# Altium PCB PC110.PcbDoc (part 18 of 24)
Units mm, origin at the board's own origin, x right, y up, seen from the top; angles counter-clockwise.
Board outline 150.05 x 107.35 mm, 10 copper layers (In2.Cu, F.Cu, B.Cu, In1.Cu, In3.Cu, In4.Cu, In5.Cu, In6.Cu, In7.Cu, In8.Cu); 936 components, 1434 nets, 4891 pads, 6088 vias.
Unrouted connection lines stored in the file: 2995.
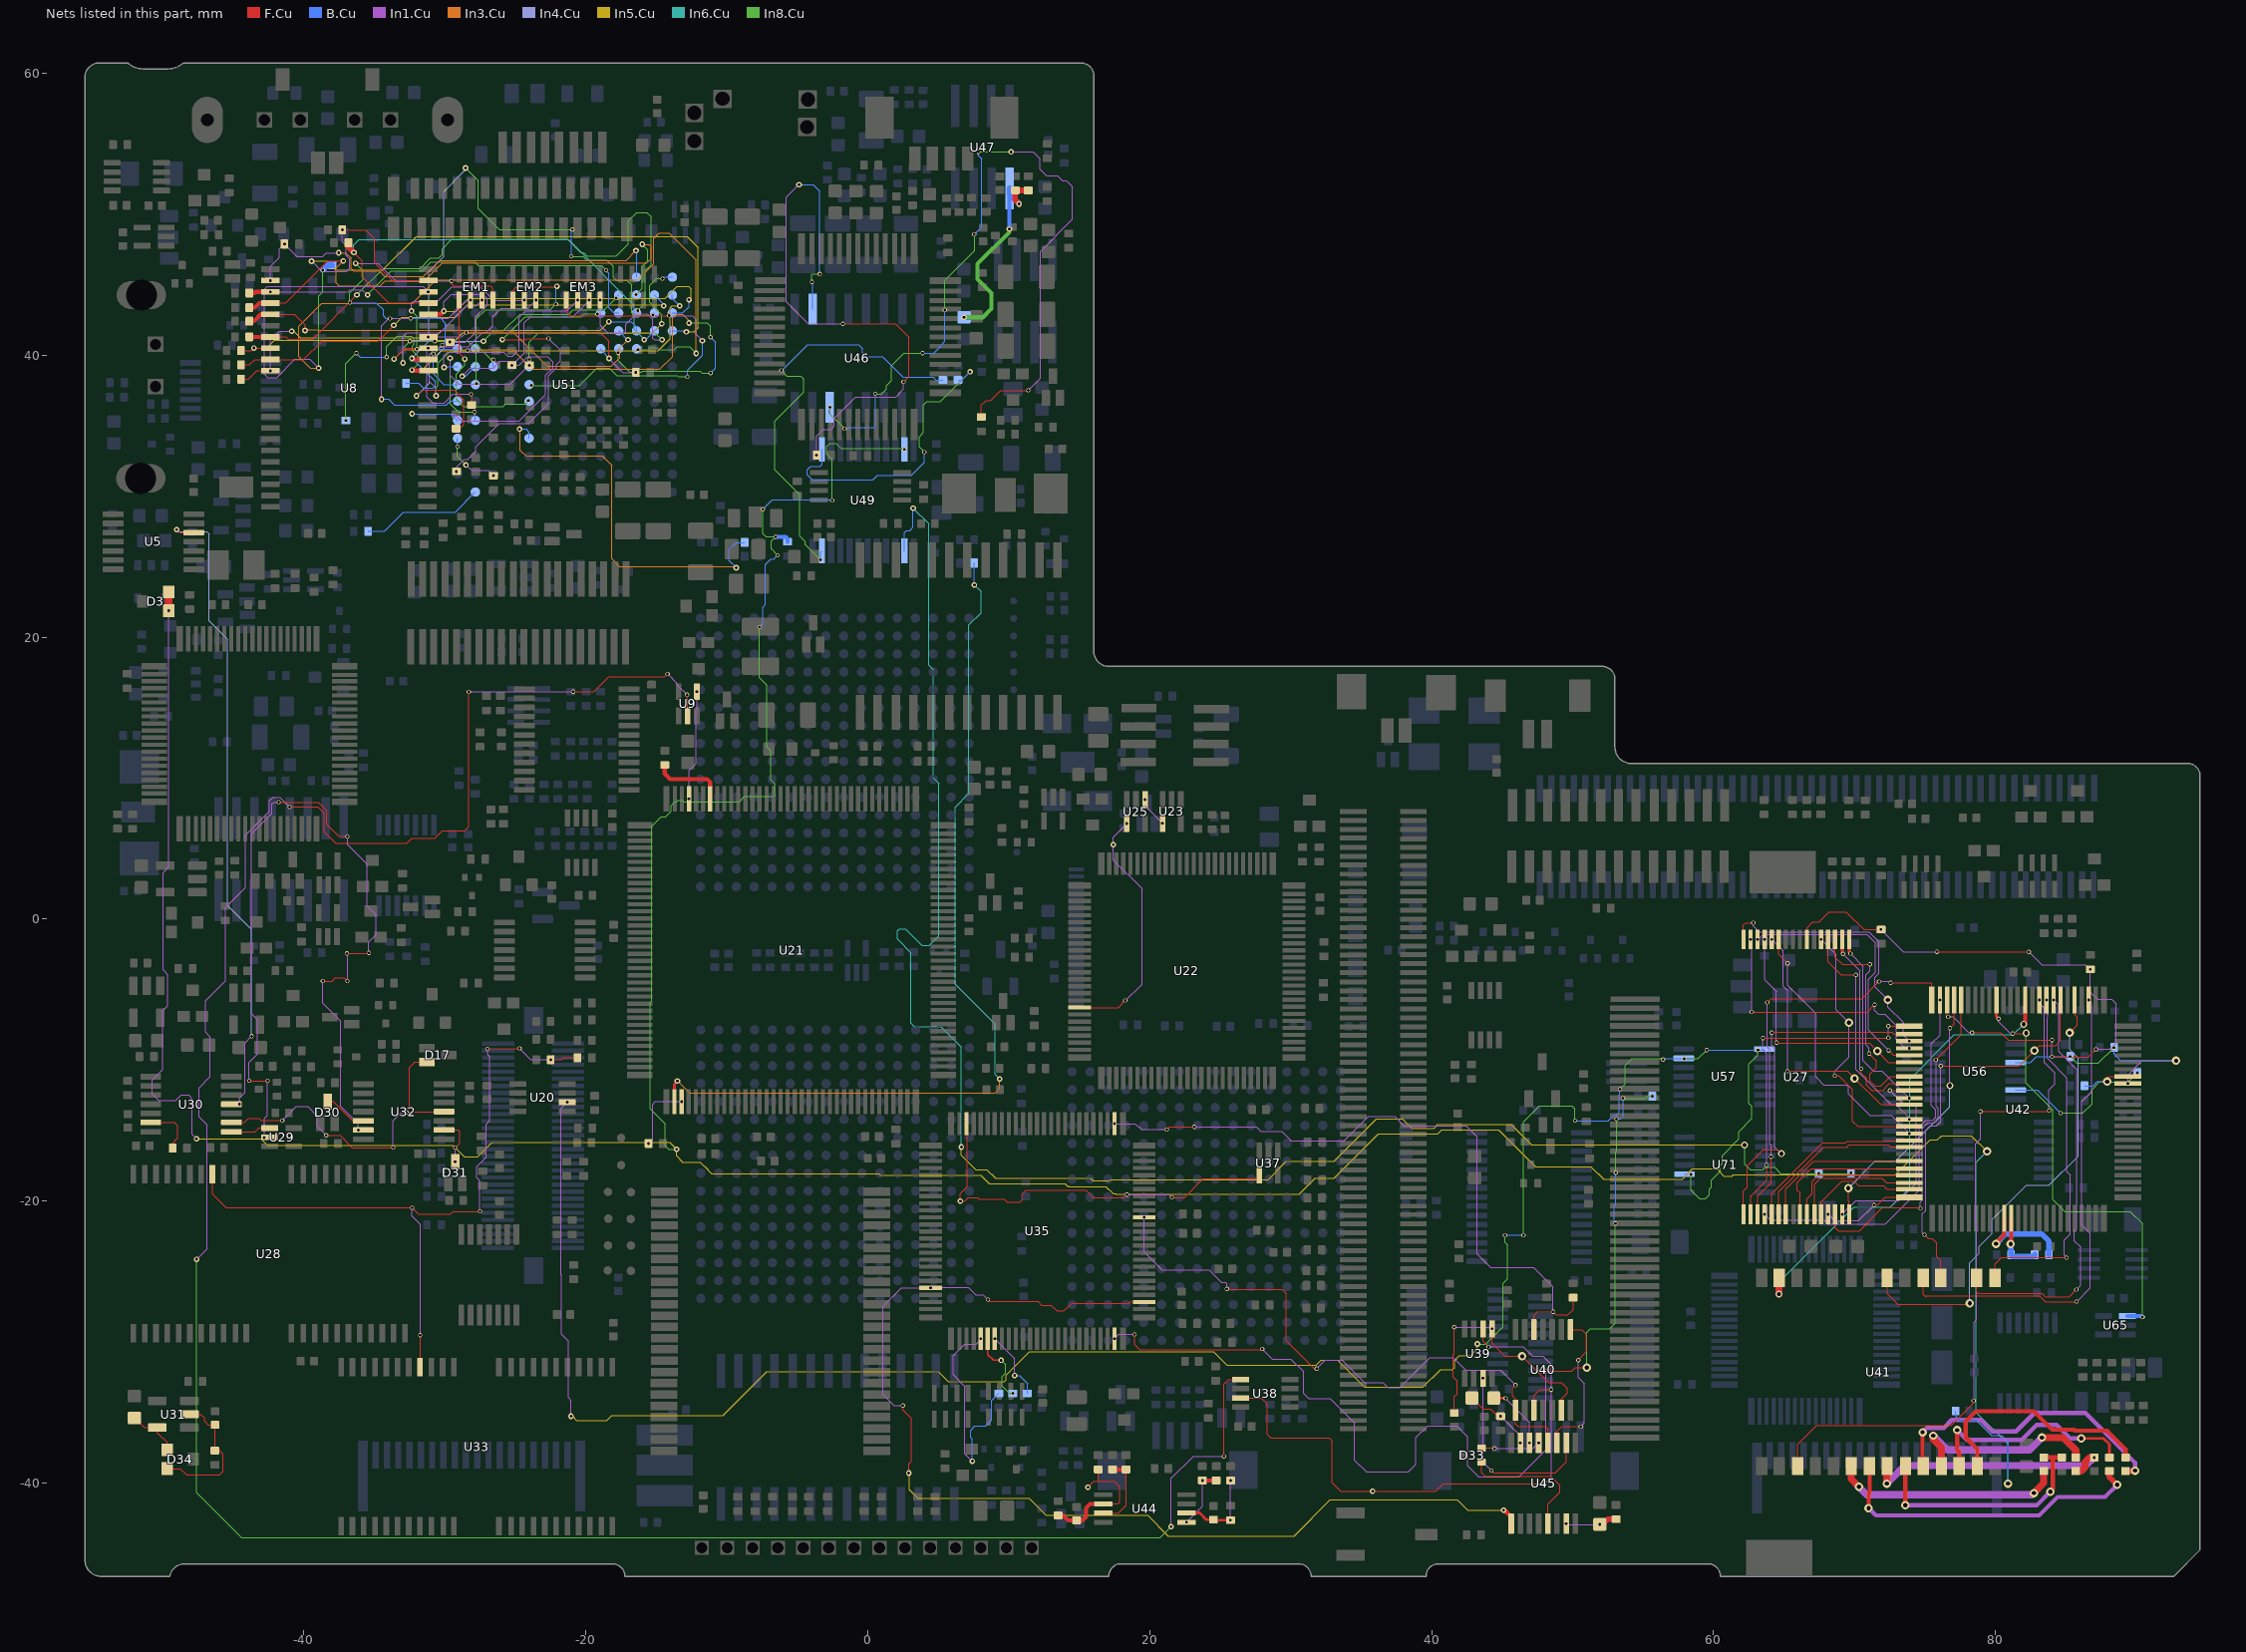
[diagram p25: the nets of this part, all layers, seen from the top]

## Via types
v1: diameter 0.3, hole 0.2, B.Cu to In8.Cu, tented both sides, 1934 vias
v2: diameter 0.4, hole 0.2, F.Cu to B.Cu, tented both sides, 1902 vias
v3: diameter 0.3, hole 0.2, F.Cu to In1.Cu, tented both sides, 1729 vias
v4: diameter 0.6, hole 0.3, F.Cu to B.Cu, tented both sides, 354 vias
v5: diameter 0.5, hole 0.3, F.Cu to B.Cu, tented both sides, 136 vias
v6: diameter 0.4, hole 0.2, B.Cu to In8.Cu, tented both sides, 12 vias
v7: diameter 0.3, hole 0.2, F.Cu to B.Cu, tented both sides, 6 vias
v8: diameter 0.6, hole 0.2, F.Cu to B.Cu, tented both sides, 4 vias
v9: diameter 0.5, hole 0.2, B.Cu to In8.Cu, tented both sides, 3 vias
v10: diameter 0.5, hole 0.2, F.Cu to B.Cu, tented both sides, 2 vias
v11: diameter 0.4, hole 0.3, F.Cu to B.Cu, tented both sides, 2 vias
v12: diameter 0.3, hole 0.2, F.Cu to In4.Cu, tented both sides, 2 vias
v13: diameter 0.6, hole 0.3, B.Cu to In8.Cu, tented both sides, 1 vias
v14: diameter 0.3, hole 0.2, F.Cu to In3.Cu, tented both sides, 1 vias

## Nets (pads, with @x,y where several pads share a name; then routed paths per layer and width w, separated by ;. In a path a pad name is that pad's centre, name@x,y a point inside that pad or via, vN(x,y) a via of type N, cw(c..) or ccw(c..) an arc to the next point about the centre after c; other vN are vias at no path point) (continued)
Net-(U20-Pad6): U20.6 U57.1 U57.13 U71.3 | length 148.8
  In1.Cu w0.08: v3(-21.32,-12.98) -21.77,-13.43 -21.77,-25.2 -21.73,-25.24 -21.73,-29.44 -21.24,-29.93 -21.24,-33.92 -21.04,-34.12 v2(-21.04,-35.25)
  In5.Cu w0.08: v2(-21.04,-35.25) -20.94,-35.25 -20.65,-35.54 -18.52,-35.54 -18.165,-35.185 -10.265,-35.185 -7.15,-32.07 5.01,-32.07 5.72,-32.78 9.7,-32.78 9.82,-32.66 9.82,-32.34 11.47,-30.69 24.52,-30.69 25.47,-31.64 31.8,-31.64 32.15,-31.29 33.33,-31.29 35.24,-33.2 39.39,-33.2 40.64,-31.95 41.47,-31.95 41.62,-31.8 41.62,-31.3 41.97,-30.95 42.77,-30.95 43.24,-30.48 v2(43.24,-30.13)
  In8.Cu w0.08: v2(43.24,-30.13) 43.82,-30.13 45.06,-28.89 45.06,-25.84 45.39,-25.51 45.39,-23.11 45.21,-22.93 v1(45.21,-22.41) ; v1(46.52,-22.41) 46.52,-14.38 47.66,-13.24 49.94,-13.24 50.17,-13.47 v1(50.17,-14.29) ; v1(53.35,-12.05) 53.72,-11.68 53.72,-10.39 54.23,-9.88 56.34,-9.88 v1(56.41,-9.95) ; v1(57.92,-9.89) 58.9,-9.89 v1(59.51,-9.28) ; v1(58.4,-18.1) 58.4,-19.21 59,-19.81 59.42,-19.81 59.71,-19.52 59.71,-19.16 59.85,-19.02 59.85,-18.5 60.48,-17.87 60.48,-17.5 60.62,-17.36 60.62,-16.76 61.79,-15.59 61.79,-15.07 62.72,-14.14 62.72,-13.27 62.5,-13.05 62.5,-10.28 63.14,-9.64 v1(63.14,-9.28)
  B.Cu w0.08: v1(45.21,-22.41) v1(46.52,-22.41) ; v1(50.17,-14.29) 52.53,-14.29 52.94,-13.88 53.11,-13.88 53.29,-13.7 53.29,-12.47 53.35,-12.41 v1(53.35,-12.05) ; v1(56.41,-9.95) 56.49,-9.87 U57.13@57.877,-9.87 57.897,-9.89 v1(57.92,-9.89) ; U71.3@57.937,-18.08 57.957,-18.1 v1(58.4,-18.1) ; v1(59.51,-9.28) v1(63.14,-9.28) 63.542,-9.28 U57.1@63.603,-9.22
Net-(U21-Chipset_IO3): R149.1 U21.39 | length 5
  In1.Cu w0.08: v3(-15.55,-15.91) -15.26,-15.62 -15.26,-13.13 -15.07,-12.94 v3(-13.206,-12.94)
Net-(U21-CPUCLK): R257.1 U21.38 | length 64.4
  F.Cu w0.2: U21.38@-13.714,-12.94 -13.714,-11.694 v2(-13.5,-11.48)
  In3.Cu w0.08: v2(-13.5,-11.48) -12.65,-12.33 9.04,-12.33 9.36,-12.01 v2(9.36,-11.33)
  In6.Cu w0.08: v2(7.56,23.71) 8.03,23.24 8.03,21.74 7.18,20.89 7.18,8.91 6.2,7.93 6.2,-4.61 9.04,-7.45 9.04,-11.01 v2(9.36,-11.33)
  B.Cu w0.08: R257.1@7.55,25.26 7.55,23.72 v2(7.56,23.71)
Net-(U21-PSU_IO2): R104.1 U21.138 | length 5.3
  F.Cu w0.3: R104.1@-14.4,10.93 -14.4,10.32 -14.02,9.94 -11.4,9.94 -11.18,9.72 U21.138@-11.18,8.535
Net-(U21-PWRGD_IN): U9.4 U21.141 | length 7.8
  In1.Cu w0.08: v3(-12.68,8.535) -12.68,10.56 -12.18,11.06 -12.18,14.84 -12.12,14.9 v3(-12.12,16.14)
Net-(U22-IOW#): U22.43 U25.4 | length 17.7
  F.Cu w0.08: U22.43@15.03,-6.26 17.76,-6.26 v3(18.26,-5.76)
  In1.Cu w0.08: v3(18.26,-5.76) 18.3,-5.76 19.46,-4.6 19.46,2.16 17.42,4.2 v2(17.42,5.28) 17.42,5.83 v3(18.37,6.78)
Net-(U23-Pad4): U23.4 U25.1 | length 2.2
  In1.Cu w0.08: v3(19.67,8.48) 19.67,8.04 v3(20.91,6.8)
Net-(U27-MA0): U27.20 U42.74 | length 26.9
  In1.Cu w0.08: v3(63.62,-20.93) 64.02,-21.33 67.85,-21.33 68.13,-21.61 72.18,-21.61 74.58,-19.21 74.58,-14.72 75.04,-14.26 75.54,-14.26 75.74,-14.06 75.74,-13.51 75.44,-13.21 75.44,-8.83 76.06,-8.21 v3(76.06,-5.725)
Net-(U27-MA1): U27.19 U42.75 | length 29
  F.Cu w0.08: U27.19@63.12,-20.93 63.12,-19.65 64.07,-18.7 v3(64.07,-16.85) ; v3(63.8,-5.91) 64.08,-5.63 70.52,-5.63 v3(71.73,-4.42) ; v3(72.56,-4.51) 75.39,-4.51 75.46,-4.58 U42.75@75.46,-5.725
  In1.Cu w0.08: v3(63.8,-5.91) 63.8,-9.03 63.86,-9.09 63.86,-9.13 63.98,-9.25 63.98,-12.8 63.98,-15.96 64.07,-16.05 v3(64.07,-16.85) ; v3(71.73,-4.42) 72.47,-4.42 v3(72.56,-4.51)
Net-(U27-MA2): U27.18 U42.76 | length 24.3
  F.Cu w0.08: U27.18@62.62,-20.93 62.62,-19.65 63.76,-18.51 v3(63.76,-17.43) ; v3(63.5,-8.43) 72.39,-8.43 v3(72.4,-8.42) ; v3(72.4,-7.58) 72.72,-7.58 72.725,-7.575 U42.76@73.885,-7.575
  In1.Cu w0.08: v3(63.5,-8.43) 63.5,-9.26 63.76,-9.52 v3(63.76,-17.43) ; v3(72.4,-8.42) v3(72.4,-7.58)
Net-(U27-MA3): U27.17 U42.77 | length 25.3
  F.Cu w0.08: U27.17@62.12,-20.93 62.12,-19.28 62.4,-19 62.4,-17.47 63.52,-16.35 64.54,-16.35 v5(64.82,-16.63) ; v3(64.13,-8.04) 64.17,-8 72.64,-8 72.79,-8.15 U42.77@73.885,-8.15
  In1.Cu w0.08: v3(64.13,-8.04) 64.13,-8.93 64.25,-9.05 64.25,-9.1 64.35,-9.2 64.35,-16.16 v5(64.82,-16.63)
Net-(U27-MA4): U27.16 U42.78 | length 19.5
  F.Cu w0.08: U27.16@62.12,-1.43 62.12,-0.4 62.27,-0.25 v3(62.81,-0.25)
  In1.Cu w0.08: v3(62.81,-0.25) 62.81,-0.47 63.24,-0.9 71,-0.9 71.71,-1.61 71.71,-3.84 71.43,-4.12 71.43,-4.79 v4(72.36,-5.72) 72.36,-6.23 73.44,-7.31 73.44,-8.205 v3(73.885,-8.65)
Net-(U27-MA5): U27.15 U42.79 | length 18.7
  F.Cu w0.08: v3(62.71,-6.58) 70.91,-6.58 v3(71.42,-6.07)
  In1.Cu w0.08: v3(62.62,-1.43) 62.71,-1.52 v3(62.71,-6.58) ; v3(71.42,-6.07) 71.42,-6.47 71.7,-6.75 72.15,-6.75 72.96,-7.56 72.96,-8.54 73.57,-9.15 v3(73.885,-9.15)
Net-(U27-MA6): U27.14 U42.80 | length 18.8
  F.Cu w0.08: v3(72.42,-9.31) 72.76,-9.65 U42.80@73.885,-9.65
  In1.Cu w0.08: v3(63.12,-1.43) 63.15,-1.43 63.51,-1.07 70.87,-1.07 71.47,-1.67 71.47,-3.77 70.97,-4.27 70.97,-7.86 v3(72.42,-9.31)
Net-(U27-MA7): U27.13 U42.81 | length 17.7
  F.Cu w0.08: v3(64.46,-8.75) 64.5,-8.79 71.05,-8.79 v4(71.62,-9.36) 72.41,-10.15 U42.81@73.885,-10.15
  In1.Cu w0.08: v3(63.62,-1.43) 63.62,-4.29 64.43,-5.1 64.43,-8.72 v3(64.46,-8.75)
Net-(U27-MA8): U27.3 U42.83 | length 16
  F.Cu w0.08: U27.3@68.62,-1.43 68.62,-2.69 69.13,-3.2 v3(71.08,-3.2) ; v3(71.03,-9.53) 71.56,-10.06 71.56,-10.53 71.1,-10.99 71.1,-11.48 71.44,-11.82 71.86,-11.82 72.53,-11.15 U42.83@73.885,-11.15
  In1.Cu w0.08: v3(71.03,-9.53) 71.03,-9.15 70.79,-8.91 70.79,-3.94 71.08,-3.65 v3(71.08,-3.2)
Net-(U27-MA9): U27.2 U42.84 | length 14.5
  F.Cu w0.08: v3(70.46,-10.6) 70.46,-10.9 70.83,-11.27 70.83,-11.77 71.18,-12.12 71.22,-12.12 71.23,-12.13 71.99,-12.13 72.47,-11.65 U42.84@73.885,-11.65
  F.Cu w0.2: U27.2@69.12,-1.43 69.12,-2.4 v3(69.18,-2.46)
  In1.Cu w0.08: v3(69.18,-2.46) 70.39,-3.67 70.39,-10.53 v3(70.46,-10.6)
Net-(U27-MA10): U27.31 U42.85 | length 15.3
  F.Cu w0.08: v3(72.5,-12.15) U42.85@73.885,-12.15
  In1.Cu w0.08: v3(69.12,-20.93) 70.09,-19.96 73.14,-19.96 74.39,-18.71 74.39,-13.31 74.23,-13.15 73.5,-13.15 v3(72.5,-12.15)
Net-(U27-MA11): U27.1 U42.86 | length 13.4
  F.Cu w0.2: U27.1@69.62,-1.43 69.62,-2.35 v3(69.71,-2.44)
  In1.Cu w0.08: v3(69.71,-2.44) 70.6,-3.33 70.6,-10.04 71.32,-10.76 71.945,-10.76 v3(73.885,-12.7)
Net-(U27-MA12): U27.12 U42.87 | length 19.4
  F.Cu w0.08: v3(65.24,-10.78) 69.48,-10.78 v4(70,-11.3) 71.85,-13.15 U42.87@73.885,-13.15
  In1.Cu w0.08: v3(64.12,-1.43) 64.93,-2.24 64.93,-4.75 65.24,-5.06 v3(65.24,-10.78)
Net-(U27-MA13): U27.4 U42.89 | length 16
  F.Cu w0.08: U27.4@68.12,-1.43 68.12,-3.02 69.04,-3.94 v3(70.09,-3.94)
  In1.Cu w0.08: v3(70.09,-3.94) 70.09,-10.67 72.56,-13.14 72.94,-13.14 73.885,-14.085 v3(73.885,-14.2)
Net-(U27-MA14): U27.5 U42.90 | length 19
  F.Cu w0.08: v3(68.59,-11.1) 68.87,-11.1 69.86,-12.09 69.86,-14.33 70.23,-14.7 U42.90@73.885,-14.7
  In1.Cu w0.08: v3(67.62,-1.43) 68.69,-2.5 68.69,-6.41 v4(69.61,-7.33) 69.61,-9.79 68.59,-10.81 v3(68.59,-11.1)
Net-(U27-MA15): U27.11 U42.91 | length 19.4
  F.Cu w0.08: U27.11@64.62,-1.43 64.62,-2.5 v3(65.25,-3.13)
  In1.Cu w0.08: v3(65.25,-3.13) 65.25,-4.68 67.22,-6.65 67.22,-11.16 67.81,-11.75 69.41,-11.75 69.56,-11.9 69.56,-12.38 71.09,-13.91 72.595,-13.91 v3(73.885,-15.2)
Net-(U27-MD0): U27.21 U42.92 | length 12.8
  F.Cu w0.08: U27.21@64.12,-20.93 64.12,-19.47 67.73,-15.86 69.35,-15.86 69.45,-15.76 71.97,-15.76 72.03,-15.7 U42.92@73.885,-15.7
Net-(U27-MD1): U27.22 U42.93 | length 12.3
  F.Cu w0.08: U27.22@64.62,-20.93 64.62,-19.34 67.8,-16.16 69.45,-16.16 69.61,-16 72.4,-16 72.55,-16.15 U42.93@73.885,-16.15
Net-(U27-MD2): U27.23 U42.95 | length 11.4
  F.Cu w0.08: U27.23@65.12,-20.93 65.12,-19.13 67.1,-17.15 U42.95@73.885,-17.15
Net-(U27-MD3): U27.25 U42.96 | length 10.7
  F.Cu w0.08: U27.25@66.12,-20.93 66.14,-20.91 66.14,-19.41 65.94,-19.21 65.94,-18.67 66.91,-17.7 U42.96@73.885,-17.7
Net-(U27-MD4): U27.26 U42.97 | length 9.6
  F.Cu w0.08: U27.26@66.62,-20.93 66.62,-19.82 66.98,-19.46 66.98,-18.6 67.43,-18.15 U42.97@73.885,-18.15
Net-(U27-MD5): U27.27 U42.98 | length 9.2
  F.Cu w0.08: U27.27@67.17,-20.93 67.17,-18.78 67.57,-18.38 71.94,-18.38 72.26,-18.7 U42.98@73.885,-18.7
Net-(U27-MD6): U27.28 U42.99 | length 8
  F.Cu w0.08: U27.28@67.62,-20.93 67.62,-20.06 69.09,-18.59 69.95,-18.59 70.26,-18.9 72.04,-18.9 72.29,-19.15 U42.99@73.885,-19.15
Net-(U27-MD7): U27.29 U42.100 | length 6.6
  F.Cu w0.08: v3(71.39,-20.28) 71.62,-20.28 72.175,-19.725 U42.100@73.885,-19.725
  In1.Cu w0.08: v3(68.12,-20.93) 68.58,-21.39 70.28,-21.39 v3(71.39,-20.28)
Net-(U27-ROMCEL0#): U27.30 U42.71 | length 24.1
  F.Cu w0.08: U27.30@68.62,-20.93 68.62,-21.87 68.85,-22.1 70.35,-22.1 71.98,-20.47 74.64,-20.47 v3(74.67,-20.5) ; v3(75.76,-9.98) 77.56,-8.18 U42.71@77.56,-5.725
  In1.Cu w0.08: v3(74.67,-20.5) 74.67,-20.07 74.81,-19.93 74.81,-14.84 75.2,-14.45 75.62,-14.45 75.92,-14.15 75.92,-13.42 75.79,-13.29 75.79,-10.01 v3(75.76,-9.98)
Net-(U27-ROMOEL#): U27.32 U42.72 | length 19.2
  F.Cu w0.08: v4(69.55,-19.08) 69.55,-19.98 69.62,-20.05 U27.32@69.62,-20.93 ; v3(76.76,-7.73) 77.06,-7.43 U42.72@77.06,-5.725
  In1.Cu w0.08: v5(76.76,-11.8) v3(76.76,-7.73)
  In4.Cu w0.08: v4(69.55,-19.08) 71.45,-17.18 72.88,-17.18 76.76,-13.3 v5(76.76,-11.8)
Net-(U27-ROMWEL#): R131.2 R134.1 U27.7 U42.73 | length 45.1
  F.Cu w0.08: U27.7@66.62,-1.43 66.62,-0.61 67.03,-0.2 67.48,-0.2 68.2,0.52 69.4,0.52 70.65,-0.73 v3(71.87,-0.73) ; v3(75.85,-2.31) 82.35,-2.31 v3(82.36,-2.32) ; U42.73@76.56,-5.725 76.56,-6.85 v3(76.64,-6.93) ; v3(78.34,-8.04) 80.36,-8.04 80.9,-8.58 v3(84.01,-8.58) ; v3(84.01,-9.76) 86.59,-9.76 v3(87.13,-9.22)
  In1.Cu w0.08: v3(71.87,-0.73) 73.45,-2.31 v3(75.85,-2.31) ; v3(76.64,-6.93) 76.99,-6.93 78.1,-8.04 v3(78.34,-8.04) ; v3(82.36,-2.32) 83.27,-3.23 86.4,-3.23 v3(86.72,-3.55) 86.72,-5.18 87.23,-5.69 88.23,-5.69 88.55,-6.01 88.55,-8.78 88.11,-9.22 v3(87.13,-9.22) ; v3(84.01,-9.76) v3(84.01,-8.58)
Net-(U28-RAS#): R101.1 R105.2 U28.15 U33.15 | length 51.5
  F.Cu w0.08: U28.15@-46.485,-18.095 -46.485,-19.485 -45.5,-20.47 v3(-32.32,-20.47) -31.86,-20.93 -29.6,-20.93 -29.39,-20.72 v3(-27.51,-20.72) ; U33.15@-31.755,-31.775 -31.74,-31.76 v3(-31.74,-29.5) ; v3(-26.97,-9.2) -26.93,-9.16 v3(-24.7,-9.16) ; v3(-22.49,-9.96) -21.72,-9.96 -21.59,-9.83 R101.1@-20.59,-9.83
  In1.Cu w0.08: v3(-32.32,-20.47) -32.32,-21.06 -31.74,-21.64 v3(-31.74,-29.5) ; v3(-27.51,-20.72) -27.51,-18.56 -27.75,-18.32 -27.75,-17.56 -27.07,-16.88 -27.07,-14.54 -26.8,-14.27 -26.8,-9.78 -26.97,-9.61 v3(-26.97,-9.2) ; v3(-24.7,-9.16) -23.9,-9.96 v3(-22.49,-9.96)
Net-(U30A-{\Q\}\)\: R146.1 U30.6 | length 3.7
  F.Cu w0.08: U30.6@-50.86,-14.42 -49.19,-14.42 -48.94,-14.67 -48.94,-15.52 -49.31,-15.89 R146.1@-49.31,-16.24
Net-(U30B-C): U5.12 U30.11 | length 45.8
  F.Cu w0.08: v2(-49.02,27.63) -48.81,27.42 U5.12@-47.807,27.42
  In1.Cu w0.08: v3(-44.56,-13.11) -44.56,-12.66 -44.17,-12.27 -44.17,-8.77 v12(-43.7,-8.3)
  In4.Cu w0.08: v2(-49.02,27.63) -48.89,27.5 -46.9,27.5 -46.73,27.33 -46.73,21.17 -45.4,19.84 -45.4,0.96 -43.7,-0.74 v12(-43.7,-8.3)
Net-(U30B-Q): D17.1 U30.9 U32.11 | length 24.1
  F.Cu w0.08: U30.9@-45.135,-14.42 -44.21,-14.42 -43.92,-14.13 -43.18,-14.13 -43.03,-14.28 v3(-41.53,-14.28) ; v3(-38.41,-15.33) -37.43,-15.33 -36.56,-16.2 v3(-33.66,-16.2) ; D17.1@-31.27,-10.14 -32.11,-10.14 -32.5,-10.53 -32.5,-13.24 -32.72,-13.46 v3(-32.72,-13.7) -32.67,-13.65 U32.11@-30.055,-13.65
  In1.Cu w0.08: v3(-41.53,-14.28) -40.54,-13.29 -39.72,-13.29 -39.04,-13.97 -39.04,-14.7 v3(-38.41,-15.33) ; v3(-33.66,-16.2) -33.66,-14.3 -33.06,-13.7 v3(-32.72,-13.7)
Net-(U30B-{\Q\}\)\: U29.1 U30.8 | length 2.8
  F.Cu w0.08: U30.8@-45.135,-15.07 -43.43,-15.07 -43.38,-15.02 -43.38,-15.01 -43.18,-14.81 U29.1@-42.41,-14.81
Net-(U31-CD): C100.1 D34.3 U31.5 | length 3.8
  F.Cu w0.08: C100.1@-52.02,-35.375 -52.015,-35.375 -51.33,-36.06 U31.5@-50.398,-36.06 -50.397,-36.423 -49.695,-37.125 D34.3@-49.695,-37.64
Net-(U31-VDD): C97.1 D34.1 R195.2 U31.2 | length 10.3
  F.Cu w0.08: D34.1@-49.695,-38.965 -48.765,-38.965 -48.31,-39.42 -45.99,-39.42 -45.72,-39.15 -45.72,-37.95 -45.98,-37.69 R195.2@-46.3,-37.69 -46.3,-35.87 C97.1@-46.29,-35.86 -46.78,-35.86 -47.05,-35.59 -47.05,-35.38 -47.32,-35.11 U31.2@-48.122,-35.11
Net-(U32A-Q): D30.3 U32.5 | length 3.1
  F.Cu w0.08: D30.3@-38.32,-12.91 -37.91,-12.91 -36.52,-14.3 U32.5@-35.78,-14.3
Net-(U32A-{\Q\}\)\: U29.2 U32.6 | length 59.9
  F.Cu w0.08: v3(-43.88,-11.46) -42.57,-11.46 v3(-42.56,-11.45) ; v3(-42.81,-15.49) -42.44,-15.49 U29.2@-42.41,-15.46 ; v3(-41.79,8.3) -38.99,8.3 -38.37,7.68 -38.37,6.73 -37.51,5.87 v3(-36.9,5.87) ; v3(-38.65,-4.39) -38,-4.39 -37.77,-4.16 -37.13,-4.16 v3(-36.9,-4.39) ; v3(-36.95,-2.43) -35.43,-2.43 v3(-35.39,-2.39)
  In1.Cu w0.08: v3(-43.88,-11.46) -43.88,-10.18 -43.28,-9.58 -43.28,-7.14 -43.71,-6.71 -43.71,6.06 -42.25,7.52 -42.25,8.17 -42.12,8.3 v3(-41.79,8.3) ; v3(-42.81,-15.49) -42.81,-14.14 -42.58,-13.91 -42.58,-11.47 v3(-42.56,-11.45) ; v3(-38.65,-4.39) -38.65,-5.96 -37.39,-7.22 -37.39,-13.26 -36.14,-14.51 v3(-36.14,-14.95) ; v3(-36.95,-2.43) -36.9,-2.48 v3(-36.9,-4.39) ; v3(-36.9,5.87) -36.9,5.3 -35.52,3.92 -35.52,0.94 -34.89,0.31 -34.89,-1.12 -35.39,-1.62 v3(-35.39,-2.39)
Net-(U32B-Q): D31.3 U32.9 | length 3.4
  F.Cu w0.08: U32.9@-30.055,-14.95 -29.08,-14.95 -28.95,-15.08 -28.95,-15.88 v3(-29.27,-16.2)
  In1.Cu w0.08: v3(-29.27,-16.2) -29.26,-16.21 v3(-29.26,-17.2)
Net-(U35-FF_2D): R186.1 U35.2 U40.12 | length 49.1
  F.Cu w0.08: v3(21.215,-14.915) 21.4,-14.73 v3(23.17,-14.73) ; U40.12@47.25,-29.1 47.25,-28.12 47.52,-27.85 v3(48.61,-27.85) 48.83,-28.07 49.67,-28.07 50.04,-27.7 R186.1@50.04,-26.84
  In1.Cu w0.08: v3(17.51,-14.5) 18.96,-14.5 19.38,-14.92 21.21,-14.92 v3(21.215,-14.915) ; v3(23.17,-14.73) 27.57,-14.73 27.89,-15.05 29.36,-15.05 30.04,-15.73 33.8,-15.73 35.53,-14 37.39,-14 38.04,-14.65 42.44,-14.65 43.23,-15.44 43.23,-23.74 44.17,-24.68 47.23,-24.68 48.61,-26.06 v3(48.61,-27.85)
Net-(U35-FF_2Q#): U35.90 U40.1 U45.12 | length 43.5
  F.Cu w0.08: v3(25.47,-26.22) 25.49,-26.24 29.39,-26.24 29.7,-26.55 29.7,-29.91 31.66,-31.87 v3(31.85,-31.87) ; v3(45.95,-33.05) 45.75,-33.25 45.75,-33.83 45.95,-34.03 U40.1@45.95,-34.825 45.95,-35.8 46.13,-35.98 48.07,-35.98 48.245,-36.155 U45.12@48.245,-37.148
  In1.Cu w0.08: v3(19.61,-21.15) 19.61,-23.61 20.88,-24.88 24.21,-24.88 25.1,-25.77 25.36,-25.77 25.47,-25.88 v3(25.47,-26.22) ; v3(31.85,-31.87) 32.46,-31.26 33.66,-31.26 35.25,-32.85 36.54,-32.85 36.91,-33.22 37.75,-33.22 39.87,-31.1 41.53,-31.1 42.42,-31.99 44.89,-31.99 v3(45.95,-33.05)
Net-(U35-Pluto_55): R398.2 U35.55 | length 16.7
  In1.Cu w0.08: v2(7.42,-38.44) 6.89,-37.91 6.89,-33.13 6.06,-32.3 6.06,-30.96 6.88,-30.14 7.69,-30.14 8.01,-29.82 v3(8.01,-29.75)
  B.Cu w0.08: v2(7.42,-38.44) 7.42,-36.88 7.3,-36.76 7.3,-36.25 7.6,-35.95 8.36,-35.95 8.78,-35.53 8.78,-34.13 9.28,-33.63 R398.2@9.3,-33.63
Net-(U35-Pluto_56): R392.2 U35.56 | length 5.3
  F.Cu w0.1: U35.56@8.51,-29.75 8.51,-30.87 8.92,-31.28 v2(9.46,-31.28)
  In8.Cu w0.08: v2(9.46,-31.28) 9.77,-31.59 9.77,-32.21 9.54,-32.44 9.54,-33.1 10.07,-33.63 v1(10.3,-33.63)
Net-(U35-Pluto_57): R399.2 U35.57 | length 5
  In1.Cu w0.08: v3(9.01,-29.75) 10.42,-31.16 v2(10.42,-32.36)
  B.Cu w0.08: v2(10.42,-32.36) 10.76,-32.36 11.32,-32.92 R399.2@11.32,-33.63
Net-(U35-PNET7_SENSE): R304.1 U35.74 | length 75.6
  F.Cu w0.08: v3(18.92,-29.45) 18.92,-30.18 19.28,-30.54 27.92,-30.54 v3(27.98,-30.48) ; v3(48.11,-32.04) 49.94,-32.04 50.18,-31.8 v4(51.01,-31.8) ; v4@50.92,-31.86 v4@50.93,-31.85
  In1.Cu w0.08: v3(17.51,-29.75) 17.82,-29.44 18.91,-29.44 v3(18.92,-29.45) ; v3(27.98,-30.48) 28.7,-31.2 30.02,-31.2 30.91,-32.09 30.91,-33.63 31.28,-34 32.81,-34 34.54,-35.73 34.54,-38.37 35.36,-39.19 38.35,-39.19 38.89,-38.65 38.89,-36.77 39.72,-35.94 41.76,-35.94 42.55,-36.73 42.55,-38.76 43.35,-39.56 46.2,-39.56 48.11,-37.65 v3(48.11,-32.04)
  In8.Cu w0.08: v4(51.01,-31.8) 51.01,-29.3 51.26,-29.05 52.62,-29.05 53.03,-28.64 v1(53.03,-21.59) ; v1(53.05,-17.98) 53.05,-16.51 53.11,-16.45 v1(53.11,-14.17) ; v1(53.58,-12.7) 55.19,-12.7 55.33,-12.56 v1(55.65,-12.56)
  B.Cu w0.08: v1(53.03,-21.59) 52.95,-21.51 52.95,-20.35 53.05,-20.25 v1(53.05,-17.98) ; v1(53.11,-14.17) 53.42,-14.17 53.58,-14.01 v1(53.58,-12.7)
Net-(U35-SA13): U35.23 U37.4 | length 28.8
  F.Cu w0.08: U35.23@7.01,-14.5 7.06,-14.55 7.06,-18.98 6.57,-19.47 v2(6.57,-20) 6.88,-20 7.12,-19.76 7.79,-19.76 7.87,-19.84 9.66,-19.84 9.89,-20.07 10.8,-20.07 10.93,-19.94 10.93,-19.53 11.24,-19.22 15.47,-19.22 15.98,-19.73 18.19,-19.73 v3(18.38,-19.54) ; v3(21.58,-19.73) 22.47,-19.73 23.78,-18.42 27.51,-18.42 U37.4@27.78,-18.15
  In1.Cu w0.08: v3(18.38,-19.54) 21.39,-19.54 v3(21.58,-19.73)
Net-(U38-Pad5): U9.2 U38.5 | length 181.6
  F.Cu w0.08: v3(-41.01,7.96) -39.01,7.96 -38.56,7.51 -38.56,6.22 -37.73,5.39 -32.67,5.39 -32.32,5.74 -30.72,5.74 -30.19,6.27 -28.57,6.27 -28.3,6.54 v3(-28.3,16.12) ; v3(-20.9,16.14) -19.43,16.14 -18.36,17.21 -14.39,17.21 v3(-14.2,17.4) ; v3(-12.81,15.92) -12.77,15.88 U9.2@-12.77,14.44 ; v3(25.26,-38.09) 25.26,-32.96 25.57,-32.65 U38.5@26.44,-32.65
  In1.Cu w0.08: v2(-47.6,-24.12) -46.86,-23.38 -46.86,-14.58 -47.43,-14.01 -47.43,-11.96 -46.64,-11.17 -46.64,-8.36 -46.98,-8.02 -46.98,-5.77 -45.56,-4.35 -45.56,0.83 -44.13,2.26 -44.13,5.96 -42.44,7.65 -42.44,8.38 -42.18,8.64 -41.69,8.64 v3(-41.01,7.96) ; v3(-28.3,16.12) -28.28,16.14 v3(-20.9,16.14) ; v3(-14.2,17.4) -13.54,16.74 -13.54,16.65 v3(-12.81,15.92) ; v2(21.52,-43.08) 21.52,-39.67 23.1,-38.09 v3(25.26,-38.09)
  In8.Cu w0.08: v2(-47.6,-24.12) -47.6,-40.68 -44.42,-43.86 -36.06,-43.86 1.35,-43.86 20.74,-43.86 v2(21.52,-43.08) 21.51,-43.08
Net-(U40A-C): U38.7 U39.2 U40.3 | length 45.1
  F.Cu w0.08: U38.7@26.44,-33.95 27.9,-33.95 28.33,-34.38 28.33,-36.55 28.58,-36.8 32.74,-36.8 32.94,-37 32.94,-39.98 33.53,-40.57 v2(35.81,-40.57) 40.3,-40.57 40.82,-40.05 47.9,-40.05 v3(47.95,-40.1) ; U39.2@43.64,-29.05 43.64,-29.93 v3(44.04,-30.33) ; U40.3@47.25,-34.825 47.25,-33.79 47.68,-33.36 v3(48.48,-33.36)
  In1.Cu w0.08: v3(44.04,-30.33) 46.49,-30.33 47.14,-30.98 47.89,-30.98 48.49,-31.58 48.49,-33.35 v3(48.48,-33.36) 48.48,-39.57 v3(47.95,-40.1)
Net-(U40A-{\Q\}\)\: C125.2 U39.1 U40.6 | length 18.5
  F.Cu w0.08: C125.2@41.6,-35.02 41.6,-33.87 41.8,-33.67 41.8,-32.75 41.53,-32.48 41.53,-30.88 41.6,-30.81 v3(41.6,-28.94) ; v3(44.29,-29.05) 44.29,-30.08 45.21,-31 v4(46.42,-31) 48.29,-32.87 49.21,-32.87 49.63,-33.29 49.63,-33.61 49.2,-34.04 U40.6@49.2,-34.825
  In1.Cu w0.08: v3(41.6,-28.94) 44.18,-28.94 v3(44.29,-29.05)
Net-(U40B-{\Q\}\)\: U40.8 U45.11 | length 11
  F.Cu w0.08: U45.11@48.895,-37.148 48.895,-36.335 49.24,-35.99 v3(50.58,-35.99) ; U40.8@49.85,-29.1 50.65,-29.1 50.98,-29.43 50.98,-30.69 v3(50.4,-31.27)
  In1.Cu w0.08: v3(50.4,-31.27) 50.4,-32.51 50.82,-32.93 50.82,-35.74 50.58,-35.98 v3(50.58,-35.99)
Net-(U41-Cext2): C141.1 U41.20 | length 16.2
  F.Cu w0.5: U41.20@69.76,-38.79 69.76,-39.71 v4(70.31,-40.26) ; v4(82.72,-40.7) 83.42,-40 C141.1@83.42,-39.145
  In1.Cu w0.5: v4(70.31,-40.26) 70.87,-40.82 82.6,-40.82 v4(82.72,-40.7)
Net-(U41-Cext3): C143.1 U41.21 | length 23
  F.Cu w0.3: v4(70.99,-41.77) 70.99,-40.74 71.07,-40.66 71.07,-38.8 U41.21@71.06,-38.79
  F.Cu w0.4: C143.1@88.07,-39.145 88.07,-39.57 v4(88.62,-40.12)
  In1.Cu w0.3: v4(70.99,-41.77) 71.51,-42.29 83.09,-42.29 84.41,-40.97 87.77,-40.97 v4(88.62,-40.12)
Net-(U41-Cext4): C142.1 C144.2 U41.22 | length 18.7
  F.Cu w0.5: v4(72.29,-40.03) 72.29,-38.81 U41.22@72.31,-38.79 ; C142.1@85.69,-39.145 86.075,-39.145 86.34,-38.88 86.34,-38.515 86.68,-38.175 v3(87,-38.175)
  In1.Cu w0.5: v4(72.29,-40.03) 73.56,-38.76 86.415,-38.76 v3(87,-38.175)
Net-(U41-Cext5): C141.2 C145.2 U41.23 | length 17.3
  F.Cu w0.3: v4(73.59,-41.57) 73.59,-38.81 U41.23@73.61,-38.79 ; C141.2@83.42,-38.175 84.015,-38.175 84.03,-38.19 ; v4(83.88,-40.61) v4@84,-40.49 ; v4@84,-40.45 v4@84,-40.49 ; C145.2@84.7,-38.175 84.045,-38.175 84.03,-38.19 ; v4@84,-40.49 84.07,-40.42 84.07,-38.23 84.03,-38.19
  In1.Cu w0.3: v4(73.59,-41.57) 82.92,-41.57 v4(83.88,-40.61)
Net-(U41-Cext6): C146.1 U41.24 | length 21.4
  F.Cu w0.08: v4@89.855,-39.145 v4(89.89,-39.11)
  F.Cu w0.3: v4(74.82,-36.39) 74.82,-38.75 U41.24@74.86,-38.79
  F.Cu w0.4: C146.1@89.22,-39.145 v4@89.855,-39.145
  In1.Cu w0.3: v4(74.82,-36.39) 75.13,-36.08 76.33,-36.08 76.89,-35.52 78.96,-35.52 79.77,-36.33 81.45,-36.33 82.76,-35.02 86.37,-35.02 89.89,-38.54 v4(89.89,-39.11)
Net-(U41-Cext7): C142.2 U41.25 | length 14.2
  F.Cu w0.5: v4(75.58,-36.63) 75.58,-36.89 76.16,-37.47 U41.25@76.16,-38.79 ; v4(83.29,-36.77) 84.8,-36.77 85.69,-37.66 C142.2@85.69,-38.175
  In1.Cu w0.5: v4(75.58,-36.63) 76.59,-37.64 82.42,-37.64 v4(83.29,-36.77)
Net-(U41-Cext8): C143.2 U41.26 | length 15.7
  F.Cu w0.2: v4(86.08,-36.82) 87.65,-36.82 88.07,-37.24 C143.2@88.07,-38.175
  F.Cu w0.3: v4(77.27,-36.24) 77.27,-37.63 77.41,-37.77 U41.26@77.41,-38.79 ; U41.26@77.3,-38.84 U41.26@77.36,-38.84
  In1.Cu w0.3: v4(77.27,-36.24) 77.96,-36.93 81.86,-36.93 82.92,-35.87 84.33,-35.87 85.28,-36.82 v4(86.08,-36.82)
Net-(U41-Cext9): C146.2 U41.27 | length 16.9
  F.Cu w0.3: U41.27@78.71,-38.79 78.71,-37.58 77.88,-36.75 77.88,-35.63 78.61,-34.9 82.7,-34.9 84.01,-36.21 85.56,-36.21 85.62,-36.27 87.91,-36.27 89.22,-37.58 C146.2@89.22,-38.175
Net-(U41-CS): U41.7 U42.55 | length 33.5
  F.Cu w0.08: U41.7@72.31,-25.44 72.31,-26.56 73.07,-27.32 78.1,-27.32 v4(78.17,-27.25) ; v4(85.25,-8.06) 85.8,-7.51 85.8,-6.95 85.61,-6.76 U42.55@85.61,-5.725
  In4.Cu w0.08: v4(78.17,-27.25) 78.17,-24.39 78.84,-23.72 78.84,-23.22 79.76,-22.3 79.76,-21.3 82.18,-18.88 83.78,-18.88 85.86,-16.8 85.86,-9.84 85.25,-9.23 v4(85.25,-8.06)
Net-(U41-PD): U41.4 U42.57 | length 28.7
  F.Cu w0.08: v3(74.96,-22.38) 75.23,-22.65 75.52,-22.65 75.83,-22.96 75.83,-23.91 76.11,-24.19 U41.4@76.11,-25.44 ; v3(76.11,-10.41) 81.65,-10.41 v4(82.75,-9.31) 83.11,-8.95 84.27,-8.95 84.61,-8.61 U42.57@84.61,-5.725
  In1.Cu w0.08: v3(74.96,-22.38) 74.79,-22.21 74.79,-20.89 75.03,-20.65 75.03,-14.99 75.36,-14.66 75.82,-14.66 76.11,-14.37 v3(76.11,-10.41)
Net-(U41-SCLK1): U41.5 U42.53 | length 35.7
  F.Cu w0.08: U41.5@74.86,-25.44 74.86,-26.6 75.04,-26.78 75.1,-26.72 83.11,-26.72 83.52,-27.13 85.74,-27.13 v3(85.75,-27.12)
  In1.Cu w0.08: v3(85.75,-27.12) 86.72,-26.15 86.72,-22.28 86.12,-21.68 86.12,-12.94 ; v3(86.61,-5.725) 86.83,-5.945 86.83,-12.23 86.12,-12.94 ; 86.81,-12.25 86.12,-12.94
Net-(U41-SI0): U41.1 U42.59 | length 25.5
  F.Cu w0.08: U41.1@79.96,-25.44 79.96,-24.46 80.42,-24 v3(85.04,-24)
  In1.Cu w0.08: v3(83.61,-5.725) 83.72,-5.835 83.72,-6.93 83.66,-6.99 83.66,-9.86 85.07,-11.27 85.07,-17.92 85.31,-18.16 85.31,-22.33 84.87,-22.77 84.87,-23.83 v3(85.04,-24)
Net-(U41-SI1): U41.2 U42.58 | length 30
  F.Cu w0.08: U41.2@78.66,-25.44 78.66,-26.42 78.77,-26.53 83.28,-26.53 83.52,-26.77 85.23,-26.77 v3(85.73,-26.27)
  In1.Cu w0.08: v3(84.11,-5.725) 84.48,-6.095 84.48,-9.4 85.755,-10.675 85.755,-21.975 85.58,-22.15 85.58,-22.812 86.03,-23.262 86.03,-25.97 v3(85.73,-26.27)
Net-(U41-SO0): U41.13 U42.62 | length 33.2
  F.Cu w0.3: v5(82,-7.45) 82.11,-7.34 U42.62@82.11,-5.725
  F.Cu w0.4: v5(64.64,-26.58) v5@64.65,-26.57
  F.Cu w0.5: v5@64.65,-26.57 64.65,-25.45 U41.13@64.66,-25.44
  In6.Cu w0.08: v5(64.64,-26.58) 64.64,-25.74 69.96,-20.42 72.54,-20.42 73.9,-19.06 73.9,-11.38 77.08,-8.2 81.25,-8.2 v5(82,-7.45)
Net-(U41-SO1): U41.17 U42.60 | length 49.5
  F.Cu w0.08: U41.17@65.96,-38.79 65.96,-37.26 67.3,-35.92 76.84,-35.92 78.44,-34.32 v3(78.44,-34.16) ; v3(78.93,-13.63) 83.74,-13.63 v3(83.79,-13.58)
  In1.Cu w0.08: v3(78.44,-34.16) 78.47,-34.13 78.47,-28.59 78.65,-28.41 78.65,-21.74 78.57,-21.66 78.57,-15.93 78.93,-15.57 v3(78.93,-13.63) ; v3(83.11,-5.725) 83.11,-5.95 83.46,-6.3 83.46,-10.17 84.2,-10.91 84.2,-11.69 83.79,-12.1 v3(83.79,-13.58)
Net-(U42-C_EXT): R362.1 R371.2 U42.12 | length 4.4
  F.Cu w0.08: v4@81.01,-22.97 v4(81.07,-23.03)
  F.Cu w0.3: v4@81.01,-22.97 81.11,-22.87 U42.12@81.11,-21.225
  B.Cu w0.4: v4(81.07,-23.03) 81.1,-23.06 R362.1@81.1,-23.8 81.22,-23.92 82.675,-23.92 R371.2@82.795,-23.8
Net-(U42-IO0): U42.66 U65.1 | length 31.3
  F.Cu w0.08: v3(81.22,-8.12) 82.13,-8.12 v5(82.17,-8.08)
  F.Cu w0.2: U42.66@80.06,-5.725 80.06,-6.9 v3(80.215,-7.055)
  In1.Cu w0.08: v3(80.215,-7.055) 80.215,-7.275 81.06,-8.12 v3(81.22,-8.12)
  In8.Cu w0.08: v5(82.17,-8.08) 82.17,-11.62 84.08,-13.53 84.08,-19.9 84.9,-20.72 89.54,-20.72 90.42,-21.6 v1(90.42,-28.22)
  B.Cu w0.3: U65.1@89.36,-28.15 90.35,-28.15 v1(90.42,-28.22)
Net-(U42-IORD): R296.2 R301.1 U42.42 U56.3 | length 17.3
  In1.Cu w0.08: v3(89.385,-11.65) 89.385,-11.045 90.39,-10.04 v4(92.81,-10.04)
  In8.Cu w0.08: v1(85.29,-9.74) 85.76,-10.21 87.29,-10.21 v1(88.4,-9.1)
  B.Cu w0.08: U56.3@81.423,-10.16 82.48,-10.16 82.9,-9.74 v1(85.29,-9.74) ; v1(88.4,-9.1) 88.4,-9.58 88.86,-10.04 v4(92.81,-10.04)
Net-(U42-IOWR): R290.1 R298.1 U42.43 U56.6 | length 14.6
  F.Cu w0.08: v4(87.91,-11.52) 87.91,-11.27 88.03,-11.15 U42.43@89.385,-11.15
  In8.Cu w0.08: v1(84.61,-13.75) 86.2,-13.75 86.84,-13.11 86.84,-12.07 87.39,-11.52 v4(87.91,-11.52) 87.94,-11.55 89.41,-11.55 v1(90.06,-10.9)
  B.Cu w0.08: U56.6@81.423,-12.11 82.97,-12.11 v1(84.61,-13.75) ; R298.1@86.31,-11.82 86.91,-11.82 87.21,-11.52 v4(87.91,-11.52)
Net-(U42-RC_IN): R371.1 U42.11 | length 7.3
  F.Cu w0.08: v4(80.03,-23.02) v4@80.03,-22.97
  F.Cu w0.3: v4@80.03,-22.97 80.61,-22.39 U42.11@80.61,-21.225
  B.Cu w0.4: v4(80.03,-23.02) 80.73,-22.32 83.26,-22.32 83.79,-22.85 R371.1@83.79,-23.8
Net-(U44A-+): R207.1 R210.1 U44.3 | length 5.3
  F.Cu w0.08: U44.3@16.71,-42.12 17.78,-42.12 18.32,-41.58 R207.1@18.32,-39.03
  F.Cu w0.3: R210.1@17.37,-39.03 R207.1@18.32,-39.03
Net-(U44A--): C137.1 R211.1 R214.1 U44.2 | length 9.9
  F.Cu w0.08: v2(15.62,-40.29) 16.05,-39.86 16.35,-39.86 ; R211.1@16.35,-39.03 16.35,-39.86 ; U44.2@16.71,-41.47 17.75,-41.47 17.88,-41.34 17.88,-40.27 17.47,-39.86 16.35,-39.86
  F.Cu w0.3: R214.1@13.5,-42.29 13.86,-42.29 14.21,-42.64 C137.1@14.81,-42.64 15.23,-42.64 15.49,-42.38 15.49,-41.76 15.78,-41.47 U44.2@16.71,-41.47
Net-(U44B-+): R208.1 R209.1 U44.5 | length 4.4
  F.Cu w0.3: v3(23.74,-39.81) R209.1@24.72,-39.81
  In1.Cu w0.08: v3(22.61,-42.77) 23.74,-41.64 v3(23.74,-39.81)
Net-(U44B--): C138.1 R212.1 R213.1 U44.6 | length 6.1
  F.Cu w0.2: U44.6@22.61,-42.12 23.54,-42.12 24.01,-42.59 C138.1@24.53,-42.59 24.56,-42.62 v3(25.73,-42.62)
  In1.Cu w0.08: v3(25.73,-42.62) 25.73,-39.82 v3(25.74,-39.81)
Net-(U45A-A): U35.46 U35.78 U45.1 | length 80.4
  F.Cu w0.08: v3(2.49,-34.49) 2.49,-34.82 3.09,-35.42 3.09,-38.39 3.08,-38.4 3.08,-38.45 2.91,-38.62 v2(2.91,-39.28) ; v3(8.52,-26.98) 8.53,-26.98 8.65,-27.1 12.07,-27.1 12.34,-27.37 13.01,-27.37 13.43,-27.79 13.91,-27.79 14.47,-27.23 18.5,-27.23 18.58,-27.15 U35.78@19.61,-27.15
  F.Cu w0.3: v2(45.1,-41.92) 45.17,-41.92 45.645,-42.395 U45.1@45.645,-42.873
  In1.Cu w0.08: v3(2.49,-34.49) 1.87,-34.49 1.09,-33.71 1.09,-27.45 2.39,-26.15 v3(4.46,-26.15) 4.5,-26.11 7.12,-26.11 7.65,-26.64 8.18,-26.64 v3(8.52,-26.98)
  In5.Cu w0.08: v2(2.91,-39.28) 2.94,-39.31 2.94,-40.45 3.56,-41.07 11.44,-41.07 12.65,-42.28 19.85,-42.28 21.32,-43.75 30.24,-43.75 32.81,-41.18 41.81,-41.18 42.55,-41.92 v2(45.1,-41.92)
Net-(U45A-Cext): C130.2 U45.14 | length 4.7
  F.Cu w0.08: v3@45.23,-33.96 v3(45.25,-33.98)
  F.Cu w0.2: C130.2@44.405,-33.96 v3@45.23,-33.96
  In1.Cu w0.08: v3(45.25,-33.98) 45.25,-33.99 46.945,-35.685 v3(46.945,-37.148)
Net-(U45A-Q): D33.2 U45.13 | length 4.2
  F.Cu w0.08: D33.2@43.53,-37.51 44.43,-37.51 v3(44.46,-37.54)
  In1.Cu w0.08: v3(44.46,-37.54) 47.202,-37.54 v3(47.595,-37.148)
Net-(U45A-RCext): C130.1 R182.2 U45.15 | length 5
  F.Cu w0.08: C130.1@42.855,-33.96 43.645,-34.75 44.17,-34.75 44.67,-35.25 v3(44.89,-35.25)
  In1.Cu w0.08: v3(44.89,-35.25) 46.295,-36.655 v3(46.295,-37.148)
Net-(U45B-B): U39.7 U45.10 | length 13.8
  F.Cu w0.08: v3(44.24,-39.11) 44.38,-39.25 48.78,-39.25 49.545,-38.485 U45.10@49.545,-37.148
  In1.Cu w0.08: v3(43.64,-32.55) 43.64,-38.51 v3(44.24,-39.11)
Net-(U45B-Q): D33.1 U45.5 | length 9.8
  F.Cu w0.08: D33.1@43.53,-38.51 43.53,-39.25 43.78,-39.5 48.45,-39.5 49.1,-40.15 49.1,-40.65 48.245,-41.505 U45.5@48.245,-42.873
Net-(U45B-RCext): C140.1 R215.1 U45.7 | length 3.7
  F.Cu w0.08: v3(51.93,-42.925) C140.1@52.115,-42.925
  F.Cu w0.4: C140.1@52.115,-42.925 52.48,-42.56 R215.1@53.08,-42.56
  In1.Cu w0.08: v3(49.545,-42.872) 49.598,-42.925 v3(51.93,-42.925)
Net-(U46-RB): R75.2 U46.14 | length 56.9
  F.Cu w0.08: R75.2@8.06,35.62 8.06,36.46 8.39,36.79 8.73,36.79 9.44,37.5 11.37,37.5 v3(11.38,37.51)
  In1.Cu w0.08: v2(10.17,54.42) 11.72,54.42 12.22,53.92 12.22,53.2 12.67,52.75 13.45,52.75 13.82,52.38 14.11,52.38 14.53,51.96 14.53,49.645 12.24,47.355 12.24,38.37 v3(11.38,37.51)
  In8.Cu w0.08: v1(-2.69,36.32) -2.69,35.84 v1(-1.64,34.79) ; v1(0.53,37.26) 0.98,37.26 1.33,37.61 1.33,37.85 1.67,38.19 1.67,39.26 2.55,40.14 3.89,40.14 v1(3.9,40.15) ; v1(5.47,43.2) 5.46,43.21 5.46,45.3 7.59,47.43 7.59,48.53 v1(7.55,48.57) ; v1(7.85,54.43) 10.16,54.43 v2(10.17,54.42)
  B.Cu w0.08: v1(-1.64,34.79) -1.37,34.79 -1.27,34.89 0.44,34.89 0.54,34.99 0.54,37.25 v1(0.53,37.26) ; v1(3.9,40.15) 4.7,40.15 5.18,40.63 5.18,40.69 5.47,40.98 v1(5.47,43.2) ; v1(7.55,48.57) 8.08,49.1 8.08,53.94 7.85,54.17 v1(7.85,54.43)
Net-(U46-toBUFF): R69.1 U46.2 | length 42.2
  F.Cu w0.08: v3(-1.77,42.23) 1.98,42.23 2.93,41.28 2.93,38.5 v3(2.54,38.11)
  In1.Cu w0.08: v2(-4.88,52.1) -5.78,51.2 -5.78,43.78 -4.23,42.23 v3(-1.77,42.23) ; v3(-3.63,32.91) -3.63,34.27 -3.16,34.74 -2.604,34.74 -2.37,34.974 -2.37,35.53 -0.85,37.05 2,37.05 2.54,37.59 v3(2.54,38.11)
  In8.Cu w0.08: v1(-3.96,45.2) -3.96,45.73 -3.93,45.76 v1(-3.4,45.76)
  B.Cu w0.08: v2(-4.88,52.1) -3.86,52.1 -3.4,51.64 v1(-3.4,45.76) ; U46.2@-3.915,43.27 -3.915,45.155 v1(-3.96,45.2) v1@-3.875,45.115
Net-(U47B-+): C158.2 R27.1 R33.1 U47.5 | length 15.4
  F.Cu w0.4: v2(10.74,50.74) 10.46,51.02 R33.1@10.46,51.69 R27.1@11.39,51.69
  In8.Cu w0.3: v6(6.83,42.695) 8.175,42.695 8.78,43.3 8.78,44.4 7.79,45.39 7.79,46.48 10.04,48.73 v6(10.04,48.95)
  B.Cu w0.3: v6(10.04,48.95) 10.04,51.805 U47.5@10.065,51.83
  B.Cu w0.4: U47.5@10.065,51.83 10.065,51.415 v2(10.74,50.74)
Net-(U49-A8): R219.2 U49.11 | length 31
  In8.Cu w0.08: v1(-6.13,38.92) -6.13,38.91 -5.75,38.53 -4.74,38.53 -4.53,38.32 -4.53,37.4 -6.6,35.33 -6.6,31.87 -4.82,30.09 -4.82,27.16 -4.44,26.78 -4.44,26.58 v1(-3.35,25.49)
  B.Cu w0.08: v1(-6.13,38.92) -6.09,38.92 -4.27,40.74 -0.65,40.74 -0.36,40.45 -0.36,40.16 -0.09,39.89 1.03,39.89 2.48,38.44 4.64,38.44 4.83,38.25 R219.2@5.33,38.25 ; v1(-3.35,25.49) -3.35,26.015 U49.11@-3.245,26.12
Net-(U49-B8): R223.1 U49.14 | length 21.3
  In8.Cu w0.08: v1(4.02,33.13) 3.65,33.5 3.65,34.22 3.94,34.51 3.94,36.47 4.19,36.72 5.15,36.72 v2(7.26,38.83)
  B.Cu w0.08: U49.14@-3.245,33.32 -3.245,32.255 -3.39,32.11 -4.04,32.11 -4.29,31.86 -4.29,31.52 -3.94,31.17 0.37,31.17 0.68,31.48 3.11,31.48 4.02,32.39 v1(4.02,33.13) ; R223.1@6.41,38.25 6.68,38.25 v2(7.26,38.83)
Net-(U49-DIR): R364.2 R370.1 U49.2 | length 125.6
  In5.Cu w0.08: v2(6.64,-16.16) 6.64,-16.74 7.66,-17.76 8.44,-17.76 9.06,-18.38 15.8,-18.38 15.98,-18.56 17.15,-18.56 17.25,-18.46 28.4,-18.46 29.69,-17.17 33.07,-17.17 36.08,-14.16 37.93,-14.16 38.6,-14.83 40.17,-14.83 40.44,-14.56 45.64,-14.56 47.09,-16.01 v5(62.2,-16.01)
  In6.Cu w0.08: v2(3.22,29.15) 4.32,28.05 4.32,18.02 4.64,17.7 4.64,10.02 5.04,9.62 5.04,-1.17 4.36,-1.85 3.85,-1.85 2.68,-0.68 2.25,-0.68 2.09,-0.84 2.09,-1.41 3.06,-2.38 3.06,-7.36 3.31,-7.61 5.18,-7.61 6.64,-9.07 v2(6.64,-16.16)
  In8.Cu w0.08: v5(62.2,-16.01) 62.2,-17.37 62.59,-17.76 63.49,-17.76 63.65,-17.6 64.325,-17.6 64.765,-18.04 v1(67.46,-18.04) 69.69,-18.04 v1(69.74,-17.99)
  B.Cu w0.08: U49.2@2.605,26.12 2.605,27.405 2.75,27.55 2.98,27.55 3.22,27.79 v2(3.22,29.15)
Net-(U49-G#): C270.2 D3.1 D3.3 R258.2 U49.23 | length 283
  F.Cu w0.5: v3(-49.585,21.89) D3.1@-49.585,23.215
  In1.Cu w0.08: v3(-49.585,21.89) -49.58,21.885 -49.58,3.73 -49.99,3.32 -49.99,-3.6 -49.64,-3.95 -49.64,-6.14 -50,-6.5 -50,-10.65 -50.74,-11.39 -50.74,-12.41 -50.29,-12.86 -49.09,-12.86 -48.71,-12.48 -48.18,-12.48 -47.91,-12.75 -47.91,-15.27 v2(-47.61,-15.57)
  In5.Cu w0.08: v2(-47.61,-15.57) -43.05,-15.57 -42.58,-16.04 -29.42,-16.04 -28.6,-16.86 -27.66,-16.86 -26.63,-15.83 -14.05,-15.83 v2(-13.56,-16.32) -13.56,-16.78 -13.12,-17.22 -11.89,-17.22 -11.33,-17.78 -11.33,-17.79 -11.07,-18.05 0.8,-18.05 0.89,-18.14 8,-18.14 8.63,-18.77 14,-18.77 14.18,-18.95 14.23,-18.95 14.24,-18.96 16.89,-18.96 17.41,-19.48 17.58,-19.48 17.605,-19.505 30.605,-19.505 31.75,-18.36 33.07,-18.36 36.21,-15.22 40.43,-15.22 40.72,-14.93 44.74,-14.93 47.355,-17.545 51.305,-17.545 52.19,-18.43 57.78,-18.43 58.5,-17.71 60.22,-17.71 60.72,-18.21 61.31,-18.21 61.39,-18.13 72.88,-18.13 75.35,-15.66 75.87,-15.66 76.17,-15.36 78.28,-15.36 v4(79.39,-16.47)
  In6.Cu w0.08: v4(79.39,-16.47) 78.63,-17.23 78.63,-34.98 80.88,-37.23 v4(80.88,-40.03)
  In8.Cu w0.08: v2(-13.56,-16.32) -14.12,-16.32 -14.37,-16.07 -14.37,-14.51 -15.42,-13.46 -15.42,-5.896 -15.34,-5.816 -15.34,6.58 -14.64,7.28 -14.34,7.28 -13.95,7.67 -13.95,8.06 -13.68,8.33 -13.55,8.33 -13.45,8.43 -13.15,8.43 -13.06,8.34 -9.1,8.34 -8.73,8.71 -6.69,8.71 -6.6,8.8 -6.6,9.59 -6.88,9.87 -6.88,11.92 -7.17,12.21 -7.17,16.61 -7.69,17.13 -7.69,20.71 v1(-7.675,20.725) ; v1(-7.44,29.08) -7.44,27.35 -7.22,27.13 -6.56,27.13 v1(-6.54,27.11) -6.85,26.8 -6.85,26.28 -6.4,25.83 v1(-6.4,25.81) ; v1(-2.52,29.7) -2.52,32.615 -2.9,32.995 -2.9,33.52 -2.68,33.74 -2.225,33.74 -1.88,33.395 2.53,33.395 v1(2.605,33.32)
  B.Cu w0.08: v1(-7.675,20.725) -7.45,20.95 -7.45,22.13 -7.27,22.31 -7.27,25.16 -6.87,25.56 -6.65,25.56 v1(-6.4,25.81) ; v1(-7.44,29.08) -6.77,29.75 -2.57,29.75 v1(-2.52,29.7) ; C270.2@77.165,-34.88 77.165,-35.235 77.48,-35.55 78.67,-35.55 79.73,-36.61 80.43,-36.61 80.88,-37.06 v4(80.88,-40.03)
  B.Cu w0.3: v1(-6.54,27.11) -5.82,27.11 -5.69,26.98 R258.2@-5.69,26.77
Net-(U51-CASAH#): R51.1 U51.J3 | length 25.3
  F.Cu w0.08: v2(-25.92,41.11) -24.28,41.11 -24.21,41.18 v3(-22.64,41.18)
  In1.Cu w0.08: v3(-29.18,31.74) -29.18,32.05 -28.6,32.63 -28.37,32.63 -27.82,33.18 -27.82,33.49 -26.15,35.16 -24.05,35.16 -22.64,36.57 -22.64,38.54 -22.075,39.105 -22.075,39.335 -21.81,39.6 -21.81,40.35 v3(-22.64,41.18)
  In8.Cu w0.08: v2(-25.92,41.11) -24.29,42.74 -20.35,42.74 -20.16,42.93 v1(-19.18,42.93)
  B.Cu w0.08: v1(-19.18,42.93) -19.01,42.93 U51.J3@-18.94,43
Net-(U51-CASAL#): R58.1 U51.K2 | length 24.4
  F.Cu w0.08: v2(-32.01,37.12) -31.6,37.53 -29.33,37.53 -28.64,36.84 -28.64,35.08 -28.93,34.79 R58.1@-29.19,34.79 R58.1@-29.18,34.78
  In4.Cu w0.08: v2(-32.01,37.12) -31.1,38.03 -31.1,39.45 -29.56,40.99 v2(-27.26,40.99)
  In8.Cu w0.08: v2(-27.26,40.99) -26.52,41.73 -25.86,41.73 -24.67,42.92 -21.21,42.92 -20.9,43.23 -18.68,43.23 v1(-17.85,44.06)
  B.Cu w0.08: v1(-17.85,44.06) -17.85,44.09 U51.K2@-17.67,44.27
Net-(U51-CCLK): R255.2 U51.E10 | length 28.2
  In3.Cu w0.08: v2(-24.7,34.76) -24.7,34.55 -24.65,34.5 -24.65,33.25 -24.25,32.85 -18.83,32.85 -18.16,32.18 -18.16,25.58 -17.61,25.03 -9.43,25.03 v2(-9.33,24.93)
  B.Cu w0.08: v2(-24.7,34.76) -24.25,34.76 -24.02,34.53 U51.E10@-24.02,34.11 ; v2(-9.33,24.93) -9.83,25.43 -9.83,26.22 -9.33,26.72 R255.2@-8.73,26.72
Net-(U51-FLM): R14.1 U51.B9 | length 13.5
  In1.Cu w0.08: v2(-29.62,39.79) -29.62,38.57 -29,37.95 -25.35,37.95 v3(-24.01,39.29)
  In8.Cu w0.08: v2(-29.62,39.79) -29.62,36.55 -29.04,35.97 v1(-27.89,35.97)
  B.Cu w0.08: v1(-27.89,35.97) -27.83,35.91 U51.B9@-27.83,35.38
Net-(U51-HSYNC): R53.2 U51.A10 | length 4.4
  In1.Cu w0.08: v2(-28.5,32.22) -28.1,31.82 -26.9,31.82 v3(-26.54,31.46)
  In8.Cu w0.08: v1(-29.1,33.52) -29.1,32.82 v2(-28.5,32.22)
  B.Cu w0.08: v1(-29.1,33.52) U51.A10@-29.1,34.11
Net-(U51-IO0): R11.1 U8.2 U51.L1 | length 32.2
  In1.Cu w0.08: v3(-42.37,45.3) -42.37,46.3 -41.73,46.94 -41.73,47.53 v3(-41.37,47.89) -40.49,47.01 -38.67,47.01 -38.41,47.27 v2(-37.53,47.27)
  In3.Cu w0.08: v2(-37.53,47.27) -37.04,47.27 -36.66,46.89 -36.66,46.17 -36.48,45.99 -34.67,45.99 -34.26,45.58 -31.5,45.58 -30.35,46.73 -17.13,46.73 v2(-16.44,47.42)
  B.Cu w0.08: v2(-16.44,47.42) -16.4,47.38 U51.L1@-16.4,45.54
Net-(U51-IO1): R1.2 U8.3 U51.K3 | length 30.4
  F.Cu w0.3: R1.2@-43.87,44.41 -43.51,44.41 -43.42,44.5 v3(-42.37,44.5)
  In1.Cu w0.08: v3(-42.37,44.5) -36.87,44.5 -36.72,44.65 -35.85,44.65 v2(-35.48,44.28)
  In8.Cu w0.08: v2(-35.48,44.28) -35.48,44.31 -33.81,45.98 -31.59,45.98 -30.97,46.6 -27.84,46.6 -27.61,46.37 -18.89,46.37 v1(-18.56,46.04)
  B.Cu w0.08: v1(-18.56,46.04) -18.56,45.99 -18.36,45.79 -18.36,43.36 -18,43 U51.K3@-17.67,43
Net-(U51-IO2): R10.2 U8.4 U51.L2 | length 38.8
  F.Cu w0.08: U8.4@-42.37,43.7 -41.28,43.7 -38.29,46.69 v2(-37.2,46.69)
  F.Cu w0.3: R10.2@-43.87,43.38 -43.49,43.38 -43.17,43.7 U8.4@-42.37,43.7
  In3.Cu w0.08: v2(-37.2,46.69) -37.71,46.18 -37.71,45.14 -37.49,44.92 -34.61,44.92 -34.25,45.28 -31.43,45.28 -30.17,46.54 -15.66,46.54 -15.35,46.85 -15.35,47.72 -15.5,47.87 v2(-16,47.87)
  In8.Cu w0.08: v1(-16.43,44.3) -15.99,44.74 -15.99,46.31 -15.6,46.7 -15.6,47.47 v2(-16,47.87)
  B.Cu w0.08: v1(-16.43,44.3) U51.L2@-16.4,44.27
Net-(U51-IO3): R6.2 U8.5 U51.K4 | length 31
  F.Cu w0.08: U8.5@-42.37,42.9 -40.69,42.9 -39.91,42.12 v2(-39.91,41.76)
  F.Cu w0.3: R6.2@-43.87,42.42 -43.53,42.42 -43.05,42.9 U8.5@-42.37,42.9
  In3.Cu w0.08: v2(-39.91,41.76) -39.87,41.8 -39.07,41.8 -39.025,41.755 -25.285,41.755 -22.74,39.21 -18.2,39.21 -17.58,39.83 -17.58,40.52 v2(-17,41.1)
  B.Cu w0.08: U51.K4@-17.67,41.73 -17.04,41.1 v2(-17,41.1)
Net-(U51-IO4): R7.2 U8.7 U51.L3 | length 41.9
  F.Cu w0.08: R7.2@-43.87,41.31 R7.2@-43.86,41.3 ; U8.7@-42.37,41.3 -41.27,41.3 -41.11,41.14 -39.38,41.14 v2(-36.24,44.28)
  F.Cu w0.3: R7.2@-43.86,41.3 U8.7@-42.37,41.3
  In8.Cu w0.08: v2(-36.24,44.28) -34.35,46.17 -31.74,46.17 -31.02,46.89 -30.43,46.89 -30.18,47.14 -30.18,47.54 -29.49,48.23 -21.31,48.23 -20.38,47.3 -20.16,47.3 -19.91,47.05 -17.84,47.05 -16.99,47.9 -16.99,49.54 -16.4,50.13 -15.66,50.13 -15.37,49.84 -15.37,46.42 -15.78,46.01 -15.78,43.7 v1(-16.31,43.17)
  B.Cu w0.08: U51.L3@-16.4,43 -16.31,43.09 v1(-16.31,43.17)
Net-(U51-IO5): R13.2 U8.8 U51.N1 | length 36.7
  F.Cu w0.08: R13.2@-44.45,40.33 -43.72,40.33 v2(-43.54,40.51) -43.53,40.5 U8.8@-42.42,40.5
  In5.Cu w0.08: v2(-43.54,40.51) -42.67,40.51 -42.6,40.58 -42.56,40.58 -42.09,41.05 -29.26,41.05 -28.72,41.59 -15.25,41.59 v2(-14.61,42.23)
  In8.Cu w0.08: v2(-14.61,42.23) -14.61,42.88 -15.48,43.75 -15.48,44.94 -14.98,45.44 v1(-14.56,45.44)
  B.Cu w0.08: v1(-14.56,45.44) -14.46,45.54 U51.N1@-13.86,45.54
Net-(U51-IO6): R5.2 U8.9 U51.M2 | length 32.8
  F.Cu w0.08: R5.2@-44.45,39.33 -43.85,39.33 -43.48,39.7 U8.9@-42.37,39.7 -40.02,39.7 -38.71,41.01 -34.72,41.01 -33.62,42.11 v2(-33.62,42.12)
  In5.Cu w0.08: v2(-33.62,42.12) -33.04,42.7 -29.29,42.7 -28.41,43.58 -14.55,43.58 v2(-14.47,43.5)
  B.Cu w0.08: U51.M2@-15.13,44.27 -14.47,43.61 v2(-14.47,43.5)
Net-(U51-IO7): R2.2 U8.10 U51.L4 | length 31.8
  F.Cu w0.08: R2.2@-44.45,38.3 -43.94,38.3 -43.34,38.9 v3(-42.37,38.9)
  In1.Cu w0.08: v3(-42.37,38.9) -42.37,41.07 -41.74,41.7 v2(-40.86,41.7)
  In5.Cu w0.08: v2(-40.86,41.7) -40.71,41.7 -40.24,41.23 -30.74,41.23 -30.2,41.77 -18.97,41.77 v2(-18.36,42.38)
  B.Cu w0.08: v2(-18.36,42.38) -16.79,42.38 -16.4,41.99 U51.L4@-16.4,41.73
Net-(U51-IO8): R269.1 U8.31 U51.N2 | length 37.3
  F.Cu w0.3: v2(-32.33,38.95) -32.28,38.9 U8.31@-31.17,38.9
  In5.Cu w0.08: v2(-32.33,38.95) -31.64,38.95 -30.26,40.33 -14.85,40.33 -14,41.18 -14,43.36 -13.86,43.5 v2(-13.34,43.5)
  In8.Cu w0.08: v1(-37.02,35.37) -37.03,35.38 -37.03,39.39 v1(-36.28,40.14) ; v1(-34.13,39.86) -34.13,40.6 -33.39,41.34 -32.35,41.34 -32.18,41.17 -32.18,40.78 -32.31,40.65 -32.31,40.33 -31.92,39.94 -31.92,39.36 v2(-32.33,38.95)
  B.Cu w0.08: v1(-36.28,40.14) -36,39.86 v1(-34.13,39.86) ; U51.N2@-13.86,44.27 -13.87,44.26 -13.87,44.03 v2(-13.34,43.5)
Net-(U51-IO9): R259.1 U8.32 U51.M3 | length 43
  F.Cu w0.3: v2(-32.34,39.78) -32.26,39.7 U8.32@-31.17,39.7
  In4.Cu w0.08: v2(-32.34,39.78) -31.13,40.99 -31.13,45.95 -30.07,47.01 -30.07,51.61 -28.53,53.15 v2(-28.53,53.28)
  In8.Cu w0.08: v2(-28.53,53.28) -28.52,53.28 -27.62,52.38 -27.62,50.39 -26.14,48.91 -20.953,48.91 v1(-20.948,48.915) ; v1(-21.04,47.02) -20.21,47.02 -19.96,46.77 -18.54,46.77 -18.06,46.29 -18.06,45.53 -17.85,45.32 -17.08,45.32 -16.74,44.98 -16.74,43.01 -16.58,42.85 v1(-15.24,42.85)
  B.Cu w0.08: R259.1@-32.76,38.02 -31.86,38.02 -31.51,37.67 -30.84,37.67 -30.68,37.83 -30.68,38.12 v2(-32.34,39.78) ; v1(-21.04,47.02) -21,47.06 -21,48.863 v1(-20.948,48.915) ; v1(-15.24,42.85) -15.24,42.89 U51.M3@-15.13,43
Net-(U51-IO10): R61.2 U8.33 U51.K5 | length 49
  F.Cu w0.08: v2(-33.6,39.73) -32.83,40.5 v3(-31.17,40.5) ; v3(-28.14,37.23) -28.1,37.19 R61.2@-28.1,36.48
  In1.Cu w0.08: v3(-31.17,40.5) -31.28,40.39 -31.28,37.05 -30.85,36.62 -30.04,36.62 -29.43,37.23 v3(-28.14,37.23)
  In3.Cu w0.08: v2(-33.6,39.73) -32.92,40.41 -25.2,40.41 -23.8,39.01 -14.75,39.01 -13.85,39.91 -13.85,42.68 -13.64,42.89 -13.13,42.89 -12.68,42.44 v2(-12.68,42.29)
  In8.Cu w0.08: v1(-17.71,40.18) -17.7,40.18 -17.7,39.61 -16.89,38.8 -16.07,38.8 -15.98,38.89 -11.9,38.89 -11.75,38.74 v1(-11.15,38.74) ; v2(-12.68,42.29) -11.4,42.29 -11.15,42.04 v1(-11.15,41.28)
  B.Cu w0.08: v1(-17.71,40.18) -17.71,40.42 U51.K5@-17.67,40.46 ; v1(-11.15,38.74) -10.8,39.09 -10.8,40.93 v1(-11.15,41.28)
Net-(U51-IO11): R18.1 U8.34 U51.J5 | length 17.7
  F.Cu w0.08: v3(-28.47,41.61) -18.98,41.61 -18.35,40.98 v2(-18.35,39.77)
  In1.Cu w0.08: v3(-31.17,41.3) -28.78,41.3 v3(-28.47,41.61) ; v2(-18.35,39.77) -17.36,38.78 v3(-16.45,38.78)
  B.Cu w0.08: U51.J5@-18.94,40.46 -18.94,40.38 -18.35,39.79 v2(-18.35,39.77)
Net-(U51-IO12): R15.1 U8.36 U51.N3 | length 31.1
  F.Cu w0.3: U8.36@-31.17,42.9 -30.3,42.9 v2(-30.07,43.13)
  In1.Cu w0.08: v2(-30.07,43.13) -30.07,43.8 -29.54,44.33 -27.3,44.33 -26.99,44.02 -26.99,43.55 -27.85,42.69 -27.85,41.61 -28.53,40.93 v3(-29.64,40.93)
  In5.Cu w0.08: v2(-30.07,43.13) -29.21,43.13 -28.31,44.03 -14.36,44.03 -13.51,44.88 -12.7,44.88 -12.54,44.72 -12.54,44.08 v2(-12.68,43.94)
  B.Cu w0.08: U51.N3@-13.86,43 -13.13,43 -12.68,43.45 v2(-12.68,43.94)
Net-(U51-IO13): R22.2 U8.37 U51.M4 | length 34.5
  F.Cu w0.08: v2(-36.45,47.29) -35.85,46.69 -35.85,45.57 -33.98,43.7 U8.37@-31.17,43.7
  F.Cu w0.4: R22.2@-36.84,47.98 -36.84,47.68 v2(-36.45,47.29)
  In6.Cu w0.08: v2(-36.45,47.29) -36.45,47.81 -36.07,48.19 -21.23,48.19 -16.55,43.51 -16.57,43.49 -16.57,41.84 -15.85,41.12 v2(-15.85,41.1)
  B.Cu w0.08: v2(-15.85,41.1) -15.76,41.1 U51.M4@-15.13,41.73
Net-(U51-IO14): R233.1 U8.38 U51.L5 | length 78.5
  In1.Cu w0.08: v2(-38.95,39.09) -39.57,39.71 -40.64,39.71 -41.92,38.43 -42.57,38.43 -42.79,38.65 -42.79,44.67 -42.57,44.89 -31.56,44.89 v3(-31.17,44.5)
  In3.Cu w0.08: v2(-38.95,39.09) -39.55,39.09 -40.36,39.9 -40.36,42.04 -38.73,43.67 -32.29,43.67 -30.63,45.33 -16.32,45.33 -15.17,46.48 -15.17,48.29 -14.8,48.66 -14.07,48.66 -12.16,46.75 -12.16,40.14 v2(-12.17,40.13)
  In8.Cu w0.08: v2(-38.95,39.09) -38.95,44.2 -38.66,44.49 v1(-38.66,46.04) ; v1(-16.3,40.39) -15.58,40.39 -15.42,40.55 -15,40.55 -14.83,40.38 -13.74,40.38 -13.51,40.61 -12.65,40.61 v2(-12.17,40.13)
  B.Cu w0.08: U51.L5@-16.4,40.46 -16.33,40.39 v1(-16.3,40.39)
  B.Cu w0.4: v1(-38.66,46.04) -38.31,46.39 R233.1@-37.99,46.39
Net-(U51-IO15): R19.2 U8.39 U51.N4 | length 51.3
  F.Cu w0.08: v3(-37.27,48.89) -35.62,48.89 -34.97,48.24 -34.97,46.53 -33.74,45.3 U8.39@-31.17,45.3
  In1.Cu w0.08: v2(-39.45,46.67) -38.74,45.96 -36.96,45.96 -36.75,46.17 -36.75,46.84 -37,47.09 -37,47.78 -37.27,48.05 v3(-37.27,48.89)
  In5.Cu w0.08: v2(-39.45,46.67) -38.36,46.67 -37.73,46.04 -34.4,46.04 -32.02,48.42 -12.81,48.42 -12.04,47.65 -12.04,42 -12.01,41.97 -12.32,41.66 v2(-12.87,41.66)
  B.Cu w0.08: U51.N4@-13.86,41.73 -12.94,41.73 v2(-12.87,41.66)
Net-(U51-LP): R17.1 U51.A9 | length 19.7
  In1.Cu w0.08: v2(-32.32,35.85) -29.34,35.85 -28.82,35.33 -24.73,35.33 -22.84,37.22 -22.84,38.59 -22.34,39.09 -22.34,39.51 -22.73,39.9 -24.13,39.9 -24.74,39.29 v3(-25.23,39.29)
  B.Cu w0.08: v2(-32.32,35.85) -29.57,35.85 U51.A9@-29.1,35.38
Net-(U51-OEL#): R263.1 U51.B13 | length 8.8
  B.Cu w0.08: R263.1@-35.44,27.52 -34.29,27.52 -32.94,28.87 -29.26,28.87 U51.B13@-27.83,30.3
Net-(U51-P0): EM1.5 U51.E8 | length 13
  F.Cu w0.08: EM1.5@-28.985,43.91 -28.98,43.905 -28.98,40.13 v2(-28.58,39.73)
  In8.Cu w0.08: v2(-28.58,39.73) -28.58,39.28 -29.2,38.66 -29.2,36.88 -28.7,36.38 -25.85,36.38 -25.69,36.54 -24.32,36.54 v1(-24.07,36.79)
  B.Cu w0.08: v1(-24.07,36.79) -24.065,36.79 U51.E8@-24.02,36.745
Net-(U51-P1): EM1.6 U51.A8 | length 17.9
  In1.Cu w0.08: v2(-34.49,36.88) -34.49,42.08 -33.95,42.62 -29.75,42.62 -28.46,43.91 v3(-28.185,43.91)
  B.Cu w0.08: v2(-34.49,36.88) -34,36.88 -33.58,36.46 -29.88,36.46 -29.595,36.745 U51.A8@-29.1,36.745
Net-(U51-P2): EM1.7 U51.B7 | length 17.7
  In1.Cu w0.08: v2(-32.97,39.46) -32.97,41.31 -32.67,41.61 -30.34,41.61 -28.45,43.5 -27.77,43.5 v3(-27.36,43.91)
  In8.Cu w0.08: v2(-32.97,39.46) -32.97,40.49 v1(-32.47,40.99) ; v1(-30.71,40.99) -30.69,41.01 -28.37,41.01 -27.76,40.4 v1(-27.76,37.99)
  B.Cu w0.08: v1(-32.47,40.99) v1(-30.71,40.99)
Net-(U51-P3): EM1.8 U51.A7 | length 28.5
  F.Cu w0.08: v3(-29.53,45.27) -29.53,45.08 -29.37,44.92 -26.75,44.92 -26.585,44.755 EM1.8@-26.585,43.91
  In1.Cu w0.08: v2(-36.32,46.52) -34.75,46.52 -33.5,45.27 v3(-29.53,45.27)
  In8.Cu w0.08: v1(-36.74,43.73) -36.74,44.42 -35.78,45.38 -35.78,45.98 v2(-36.32,46.52) ; v1(-33.88,42.61) -33.87,42.62 v1(-32.42,42.62) ; v1(-30.81,40.09) -30.19,40.71 v1(-30.19,40.72)
  B.Cu w0.08: v1(-36.74,43.73) -34.87,43.73 -34.36,43.22 -34.36,42.78 -34.19,42.61 v1(-33.88,42.61) ; v1(-32.42,42.62) -32.4,42.64 -30.33,42.64 -29.97,42.28 -29.97,40.94 v1(-30.19,40.72) ; v1(-30.81,40.09) -30.81,38.68 -30.05,37.92 U51.A7@-29.1,37.92
Net-(U51-P4): EM3.5 U51.E7 | length 26.8
  F.Cu w0.08: EM3.5@-21.375,43.91 -21.375,43.095 -21.09,42.81 v3(-14.09,42.81)
  In1.Cu w0.08: v3(-14.09,42.81) -14.06,42.78 -12.44,42.78 -12.19,42.53 -12.19,41.49 v2(-11.73,41.03)
  In8.Cu w0.08: v1(-23.86,37.86) -20.46,37.86 -19.22,39.1 -18.33,39.1 -17.8,38.57 -13.52,38.57 -13.42,38.47 v1(-12.79,38.47)
  B.Cu w0.08: v1(-12.79,38.47) -12.79,38.94 -11.73,40 v2(-11.73,41.03)
Net-(U51-P5): EM3.6 U51.A6 | length 14.5
  In1.Cu w0.08: v2(-30.05,39.14) -30.05,39.97 -29.81,40.21 -25.82,40.21 -25.55,39.94 -25.17,39.94 -24.72,40.39 -24.72,42.69 -24.26,43.15 -21.335,43.15 v3(-20.575,43.91)
  B.Cu w0.08: v2(-30.05,39.14) -30,39.19 U51.A6@-29.1,39.19
Net-(U51-P6): EM3.7 U51.B6 | length 13.7
  In1.Cu w0.08: v2(-28.77,38.51) -28.19,39.09 -28.19,39.1 -26.57,39.1 -26.1,39.57 -24.94,39.57 -24.36,40.15 -24.36,42.29 -23.91,42.74 -20.92,42.74 v3(-19.75,43.91)
  B.Cu w0.08: v2(-28.77,38.51) -28.51,38.51 U51.B6@-27.83,39.19
Net-(U51-P7): EM3.8 U51.E6 | length 20.4
  In1.Cu w0.08: v3(-18.975,43.91) -18.975,42.125 -18.41,41.56 -17.31,41.56 -17.16,41.71 -17.16,42.21 -16.43,42.94 -15.64,42.94 -15.24,42.54 -15.24,41.22 -15.12,41.1 v2(-14.59,41.1)
  In8.Cu w0.08: v1(-24.01,39.71) -24.01,40.94 -23.38,41.57 -15.06,41.57 v2(-14.59,41.1)
  B.Cu w0.08: U51.E6@-24.02,39.19 -24.02,39.7 v1(-24.01,39.71)
Net-(U51-P8): EM2.5 U51.C6 | length 15.3
  F.Cu w0.08: EM2.5@-25.155,43.91 -25.155,44.615 -24.93,44.84 -22.1,44.84 v2(-22.05,44.89)
  In8.Cu w0.08: v1(-26.56,39.69) -26.72,39.69 -27.76,40.73 -27.76,42.57 -27.1,43.23 -22.52,43.23 v1(-22.12,43.63)
  B.Cu w0.08: U51.C6@-26.56,39.19 v1(-26.56,39.69) ; v1(-22.12,43.63) -22.12,44.82 v2(-22.05,44.89)
Net-(U51-P9): EM2.6 U51.A5 | length 15.2
  In1.Cu w0.08: v2(-32.36,43.14) -32.38,43.16 -32.38,43.69 -32.24,43.83 -30.53,43.83 -29.5,44.86 -27.48,44.86 -26.53,43.91 v3(-24.355,43.91)
  In8.Cu w0.08: v2(-32.36,43.14) -31.97,42.75 v1(-31.97,40.43)
  B.Cu w0.08: v1(-31.97,40.43) -31.96,40.42 -29.14,40.42 U51.A5@-29.1,40.46
Net-(U51-P10): EM2.7 U51.B5 | length 18.1
  In1.Cu w0.08: v2(-30.62,37.12) -30.62,37.68 -31.08,38.14 -31.08,40.04 -30.5,40.62 -28.32,40.62 -27.31,41.63 -27.06,41.63 -26.61,42.08 -26.61,42.71 -25.99,43.33 -24.11,43.33 v3(-23.53,43.91)
  In8.Cu w0.08: v2(-30.62,37.12) -30.62,37.7 -30.48,37.84 -30.48,39.44 -29.58,40.34 v1(-28.39,40.34)
  B.Cu w0.08: v1(-28.39,40.34) -28.27,40.46 U51.B5@-27.83,40.46